# Altium PCB PCB2.PcbDoc
Units mil, origin at the board's own origin, x right, y up, seen from the top; angles counter-clockwise.
Board outline 6000 x 4000 mil, 2 copper layers (Top Layer, Bottom Layer); 43 components, 36 nets, 108 pads, 0 vias.
Unrouted connection lines stored in the file: 72.
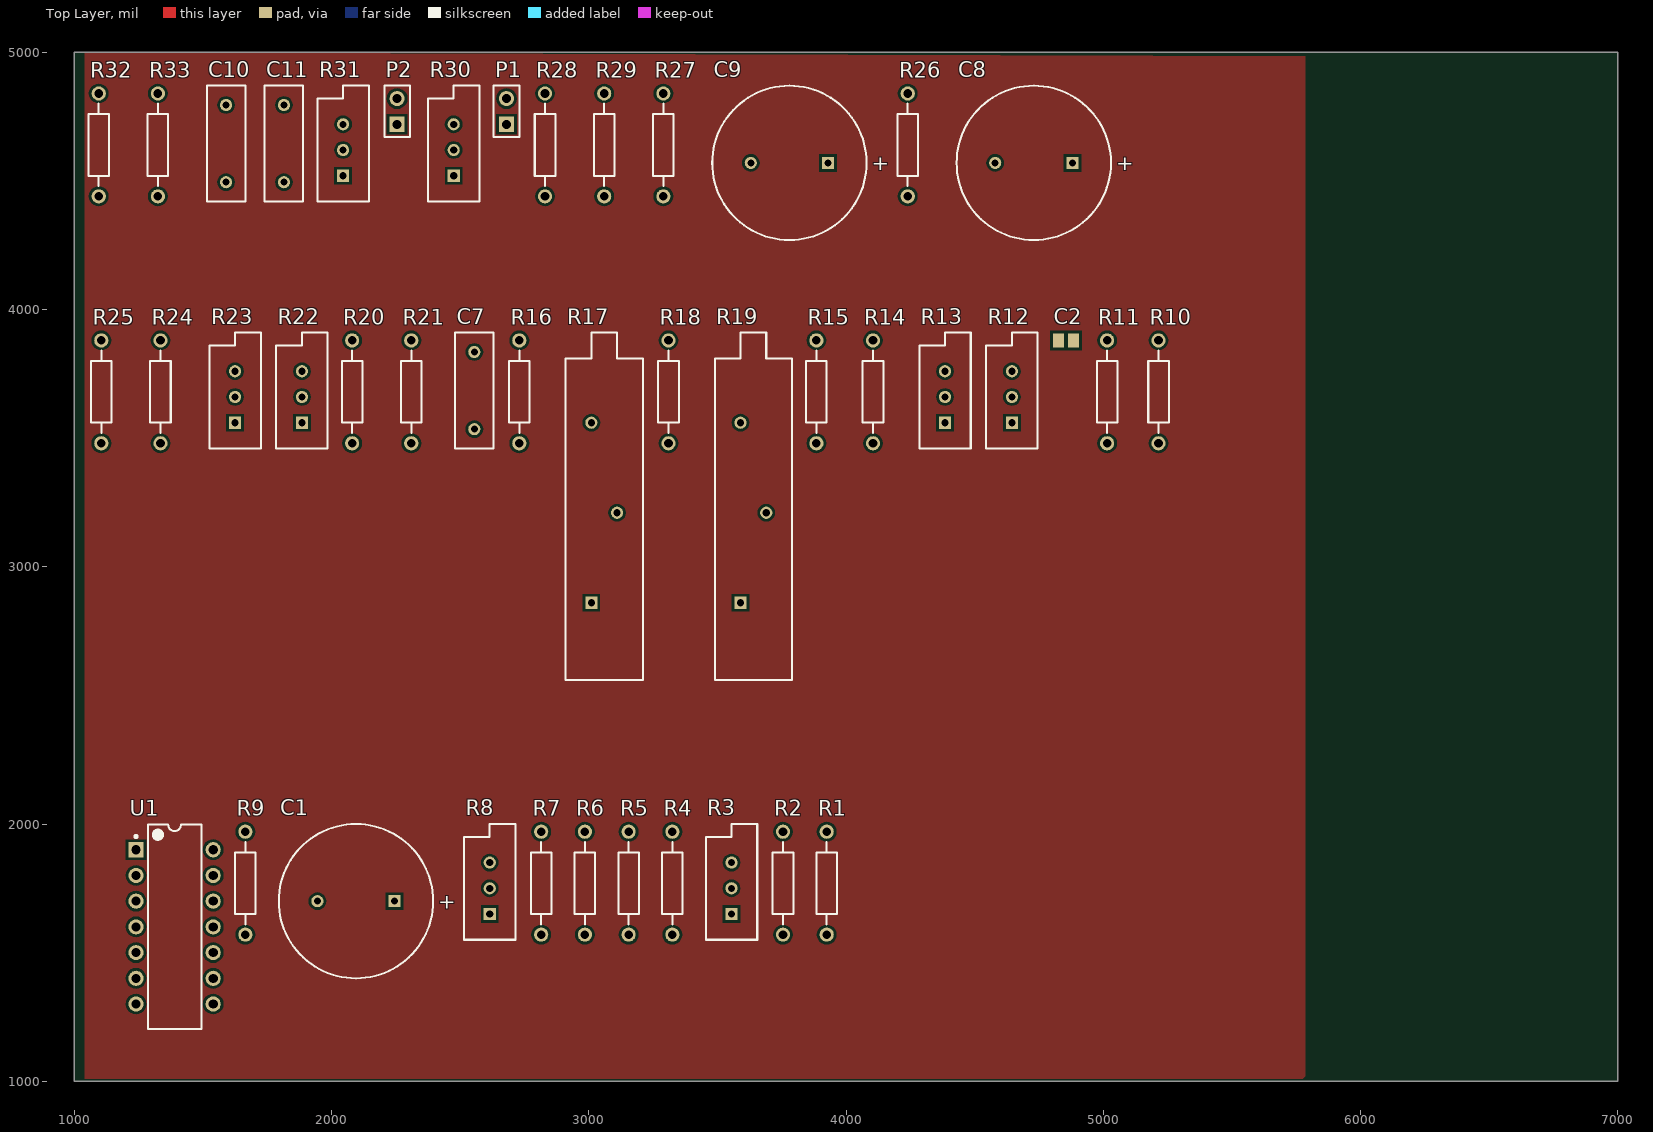
[diagram p0: Top Layer view]
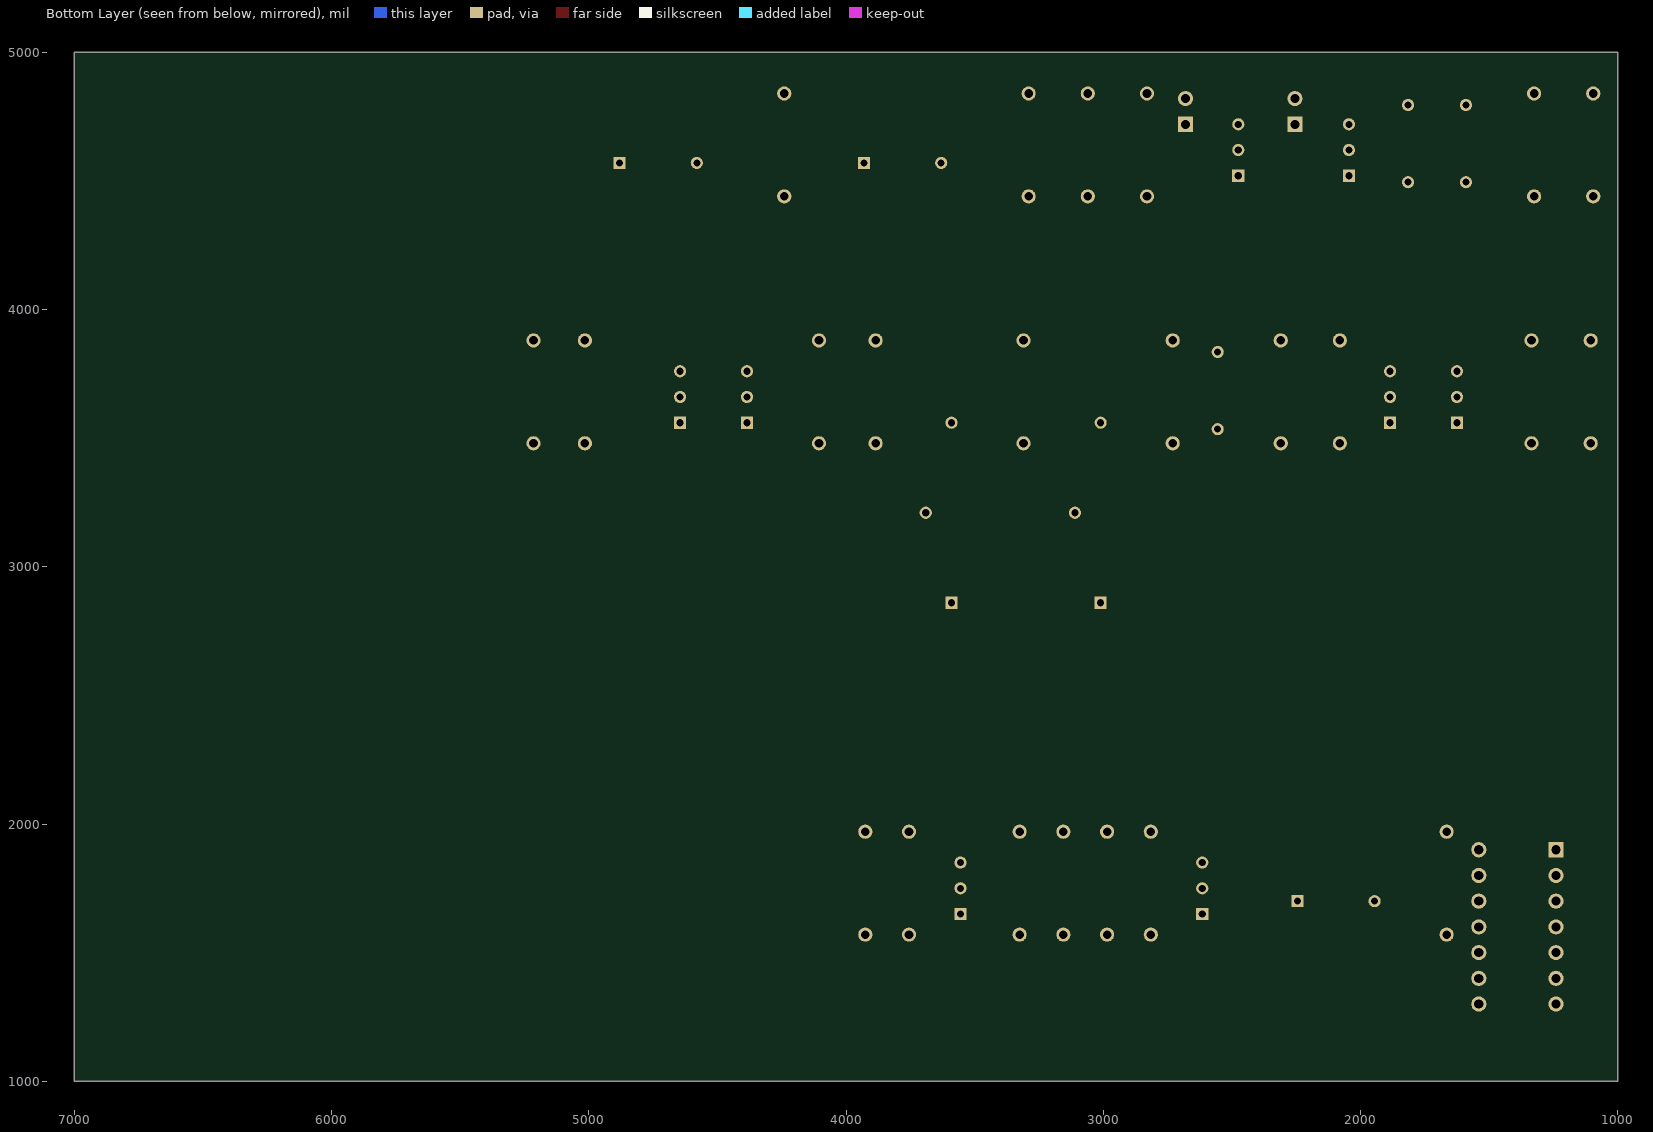
[diagram p1: Bottom Layer view, seen from below]

## Layer stack, top to bottom
Top Solder: solder mask 0.4, Solder Resist, Dk 3.5
Top Layer: signal copper 1.4
Dielectric 1: dielectric 12.6, FR-4, Dk 4.8
Bottom Layer: signal copper 1.4
Bottom Solder: solder mask 0.4, Solder Resist, Dk 3.5

## Board outline
1000,1000 7000,1000 7000,5000 1000,5000

## Design rules (kind name [scope] priority, off if disabled: settings)
Clearance [All] p1: gap=10 ignorepadtopadclearanceinfootprint=FALSE except(0: Arc-Hole Track-Hole SMDPad-Hole THPad-Hole Via-Hole Fill-Hole Poly-Hole Region-Hole Text-Hole)
PolygonConnect [All] p1: connectstyle=Relief reliefconductorwidth=10 reliefentries=4 polygonreliefangle="90 Angle" airgapwidth=10
RoomDefinition Sheet2 [InComponentClass('Sheet2')] p1: confinementstyle=ConfineIn formatcopy=TRUE lockcomponents=FALSE outline 1045,1000 5780,1000 5780,4980 1045,4980
RoutingVias [All] p1: holewidth=28 width=50 viastyle="Through Hole" minholewidth=28 minwidth=50 maxholewidth=28 maxwidth=50
SolderMaskExpansion [All] p1: expansion=4
Width [All] p1: maxlimit=10 minlimit=10 preferedwidth=10
30 further rules are at their usual default settings.

## Components (designator, comment, footprint, x,y, rotation, side; value= is the part's Value field where it differs from the comment)
C1 "Cap Pol1" RB7.6-15 2095,1700 r0 top value=100UF
C2 "Cap Pol3" C0805 4855,3880 r0 top value=100pF
C7 "Cap" RAD-0.3 2555,3685 r90 top value=1000pF
C8 "Cap Pol1" RB7.6-15 4730,4570 r0 top value=100pF
C9 "Cap Pol1" RB7.6-15 3780,4570 r0 top value=1uF
C10 "Cap" RAD-0.3 1590,4645 r90 top value=1000pF
C11 "Cap" RAD-0.3 1815,4645 r90 top value=330pF
P1 "Header 2" HDR1X2 2680,4720 r90 top
P2 "Header 2" HDR1X2 2255,4720 r90 top
R1 "Res2" AXIAL-0.4 3925,1770 r90 top value=4.7K
R2 "Res2" AXIAL-0.4 3755,1770 r90 top value=18K
R3 "RPot" VR5 3555,1750 r90 top value=10K
R4 "Res2" AXIAL-0.4 3325,1770 r90 top value=1K
R5 "Res2" AXIAL-0.4 3155,1770 r90 top value=5.1K
R6 "Res2" AXIAL-0.4 2985,1770 r90 top value=1K
R7 "Res2" AXIAL-0.4 2815,1770 r90 top value=4.7K
R8 "RPot" VR5 2615,1750 r90 top value=1K
R9 "Res2" AXIAL-0.4 1665,1770 r90 top value=1K
R10 "Res2" AXIAL-0.4 5215,3680 r90 top value=1K
R11 "Res2" AXIAL-0.4 5015,3680 r90 top value=10K
R12 "RPot" VR5 4645,3660 r90 top value=1K
R13 "RPot" VR5 4385,3660 r90 top value=2K
R14 "Res2" AXIAL-0.4 4105,3680 r90 top value=600
R15 "Res2" AXIAL-0.4 3885,3680 r90 top value=600
R16 "Res2" AXIAL-0.4 2730,3680 r90 top value=3K
R17 "Res Tap" VR3 3060,3210 r90 top value=1K
R18 "Res2" AXIAL-0.4 3310,3680 r90 top value=3K
R19 "Res Tap" VR3 3640,3210 r90 top value=1K
R20 "Res2" AXIAL-0.4 2080,3680 r90 top value=30K
R21 "Res2" AXIAL-0.4 2310,3680 r90 top value=4.7K
R22 "RPot" VR5 1885,3660 r90 top value=1K
R23 "RPot" VR5 1625,3660 r90 top value=1K
R24 "Res2" AXIAL-0.4 1335,3680 r90 top value=10K
R25 "Res2" AXIAL-0.4 1105,3680 r90 top value=1K
R26 "Res2" AXIAL-0.4 4240,4640 r90 top value=4.7K
R27 "Res2" AXIAL-0.4 3290,4640 r90 top value=4.7K
R28 "Res2" AXIAL-0.4 2830,4640 r90 top value=10K
R29 "Res2" AXIAL-0.4 3060,4640 r90 top value=51K
R30 "RPot" VR5 2475,4620 r90 top value=1K
R31 "RPot" VR5 2045,4620 r90 top value=1K
R32 "Res2" AXIAL-0.4 1095,4640 r90 top value=1K
R33 "Res2" AXIAL-0.4 1325,4640 r90 top value=600
U1 "LM324" DIP-14 1390,1600 r0 top

## Footprints (in the part's own frame and the unit in brackets; to place one, negate y for a bottom-side part, rotate by r counter-clockwise, add the part's x,y. Pads: shape width x height; smd on the part's side, far side on the other; paste and mask are expansions set on the pad)
AXIAL-0.4 [mm] "Axial Device, Thru-Hole; 2 Leads; 0.4 in Pin Spacing"
  round 1.4 hole 0.85: 1(-5.08,0) 2(5.08,0)
  silkscreen extent -4.06,-1.02 4.06,1.02
C0805 [mm] "Chip Capacitor, Body 2.0x1.3mm, IPC High Density"
  rect 1.1x1.4 smd: 1(-0.75,0) 2(0.75,0)
  body extent -1.1,-0.72 1.1,0.72, height 1.4
DIP-14 [mm] "DIP; 14 Leads; Row Spacing 7.62 mm; Pitch 2.54 mm"
  rect 1.5x1.5 hole 0.9: 1(-3.81,7.62)
  round 1.5 hole 0.9: 2(-3.81,5.08) 3(-3.81,2.54) 4(-3.81,0) 5(-3.81,-2.54) 6(-3.81,-5.08) 7(-3.81,-7.62) 8(3.81,-7.62) 9(3.81,-5.08) 10(3.81,-2.54) 11(3.81,0) 12(3.81,2.54) 13(3.81,5.08) 14(3.81,7.62)
  silkscreen extent -3.93,-10.1 2.65,10.1, body extent -3.6,-10.1 3.6,10.1, height 5.08
HDR1X2 [mm] "Connector; Header; 2 Position"
  rect 1.5x1.5 hole 0.9: 1(0,0)
  round 1.5 hole 0.9: 2(2.54,0)
  silkscreen extent -1.27,-1.27 3.81,1.27
RAD-0.3 [mm] "Radial Cap, Thru-Hole; 2 Leads; 0.3 in Pin Spacing"
  round 1.2 hole 0.7: 1(-3.81,0) 2(3.81,0)
  silkscreen extent -5.71,-1.91 5.71,1.91
RB7.6-15 [mm] "Polarized Capacitor (Radial); 2 Leads"
  rect 1.2x1.2 hole 0.7: 1(3.81,0)
  round 1.2 hole 0.7: 2(-3.81,0)
  silkscreen extent -7.62,-7.62 7.62,7.62
VR3 [mm] "Thru-Hole; 3 Leads"
  rect 1.2x1.2 hole 0.7: 1(-8.89,1.27)
  round 1.2 hole 0.7: 2(0,-1.27) 3(8.89,1.27)
  silkscreen extent -16.51,-3.81 17.78,3.81
VR5 [mm] "Thru-Hole; 3 Leads"
  rect 1.2x1.2 hole 0.7: 1(-2.54,0)
  round 1.2 hole 0.7: 2(0,0) 3(2.54,0)
  silkscreen extent -5.08,-2.54 6.35,2.54

## Part data
C1 C8 C9: "Polarized Capacitor (Radial)", LatestRevisionDate=17-Jul-2002, LatestRevisionNote="Re-released for DXP Platform.", PackageDescription="Polarized Capacitor (Radial); 2 Leads", PackageReference=RB7.6-15, Published=8-Jun-2000, Publisher="Altium Limited"
C2: "Polarized Capacitor (Surface Mount)", LatestRevisionDate=29-May-2009, LatestRevisionNote="IPC-7351 Footprint Added.", PackageDescription="Chip Capacitor", PackageReference=C0805, Published=8-Jun-2000, Publisher="Altium Limited"
C7 C10 C11: "Capacitor", LatestRevisionDate=17-Jul-2002, LatestRevisionNote="Re-released for DXP Platform.", PackageDescription="Radial Cap, Thru-Hole; 2 Leads; 0.3 in Pin Spacing", PackageReference=RAD-0.3, Published=8-Jun-2000, Publisher="Altium Limited"
P1 P2: "Header, 2-Pin", LatestRevisionDate=17-Jul-2002, LatestRevisionNote="Re-released for DXP Platform.", Publisher="Altium Limited"
R1 R2 R4 R5 R6 R7 R9 R10 R11 R14 R15 R16 R18 R20 R21 R24 R25 R26 R27 R28 R29 R32 R33: "Resistor", LatestRevisionDate=17-Jul-2002, LatestRevisionNote="Re-released for DXP Platform.", PackageDescription="Axial Device, Thru-Hole; 2 Leads; 0.4 in Pin Spacing", PackageReference=AXIAL-0.4, Published=8-Jun-2000, Publisher="Altium Limited"
R3 R8 R12 R13 R22 R23 R30 R31: "Potentiometer", LatestRevisionDate=17-Jul-2002, LatestRevisionNote="Re-released for DXP Platform.", PackageDescription="Variable Resistor, Thru-Hole; 3 Leads", PackageReference=VR5, Published=8-Jun-2000, Publisher="Altium Limited", Set Position=0.5, Sim Note="Enter the Resistance value and the set point into parameter fields."
R17 R19: "Tapped Resistor", LatestRevisionDate=17-Jul-2002, LatestRevisionNote="Re-released for DXP Platform.", PackageDescription="Variable Resistor, Thru-Hole; 3 Leads", PackageReference=VR3, Published=24-Mar-1999, Publisher="Altium Limited", Set Position=0.5, Sim Note="Enter the Resistance value and the set point into parameter fields."

## Nets (pads, with @x,y where several pads share a name; then routed paths per layer and width w, separated by ;. In a path a pad name is that pad's centre, name@x,y a point inside that pad or via, vN(x,y) a via of type N, cw(c..) or ccw(c..) an arc to the next point about the centre after c; other vN are vias at no path point)
GND: C1.2 C11.1 P1.2 P2.2 R7.1 R12.1 R13.1 R14.1 R15.1 R27.1 R30.1 R31.1 R32.2 R33.2 U1.4
NetC2_1: C2.1 R12.2
NetC3_2: R13.2
NetC4_1: R11.1 R16.1
NetC4_2: R17.1 R17.3 U1.5
NetC5_1: 
NetC6_2: R18.1
NetC7_1: C7.1 R24.2 R25.2 U1.9
NetC7_2: C7.2 C8.1 R10.2 R28.1 U1.8
NetC8_2: C8.2 R30.2
NetC9_1: C9.1 C10.1 C11.2 R29.2 U1.12 U1.13 U1.14
NetC9_2: C9.2 R31.2
NetC10_2: C10.2 R28.2 R29.1
NetR2_1: R2.1 R11.2 U1.6
NetR2_2: R2.2 R3.2
NetR4_1: R4.1 U1.1
NetR4_2: R4.2 R6.1 R10.1 U1.2
NetR5_2: R5.2 R8.2
NetR6_2: R6.2 R8.3
NetR8_1: R8.1 R9.2
NetR16_2: R16.2 R17.2
NetR18_2: R18.2 R19.2
NetR20_1: R20.1 R22.2
NetR21_1: R21.1 R23.2
NetR22_1: R22.1 R26.2
NetR22_3: R22.3 R25.1
NetR23_1: R23.1 R27.2
OUT1: R13.3 R15.2
OUT1A: 
OUT2: P1.1 P2.1 R30.3 R31.3 R32.1 R33.1
OUT4: R12.3 R14.2
OUT4A: C2.2 R3.1 R3.3 R5.1 R19.1 R19.3 U1.7
OUTA: R20.2
V0: R9.1 U1.3
VCC: C1.1 R1.1 R1.2 R7.2 R21.2 U1.11
vo: R26.1 U1.10
pads on no net: R23.3 R24.1

## Polygon pours and split planes (outlines as drawn)
no net on Top Layer (solid, pour order 2): 1040,5000 1040,1010 5775,1010 5785,1020 5785,4985

## Text inside footprints (layer, text, board x,y; h text height)
C1: Top Overlay "+" at 2415.15,1670.99 h59.06
C8: Top Overlay "+" at 5050.15,4540.99 h59.06
C9: Top Overlay "+" at 4100.15,4540.99 h59.06